# Altium PCB 03-Offset_et_PBF.PcbDoc
Units mm, origin at the board's own origin, x right, y up, seen from the top; angles counter-clockwise.
Board outline 40 x 45 mm, 2 copper layers (Top Layer, Bottom Layer), stack 1.534 mm thick; 21 components, 17 nets, 59 pads, 4 vias.
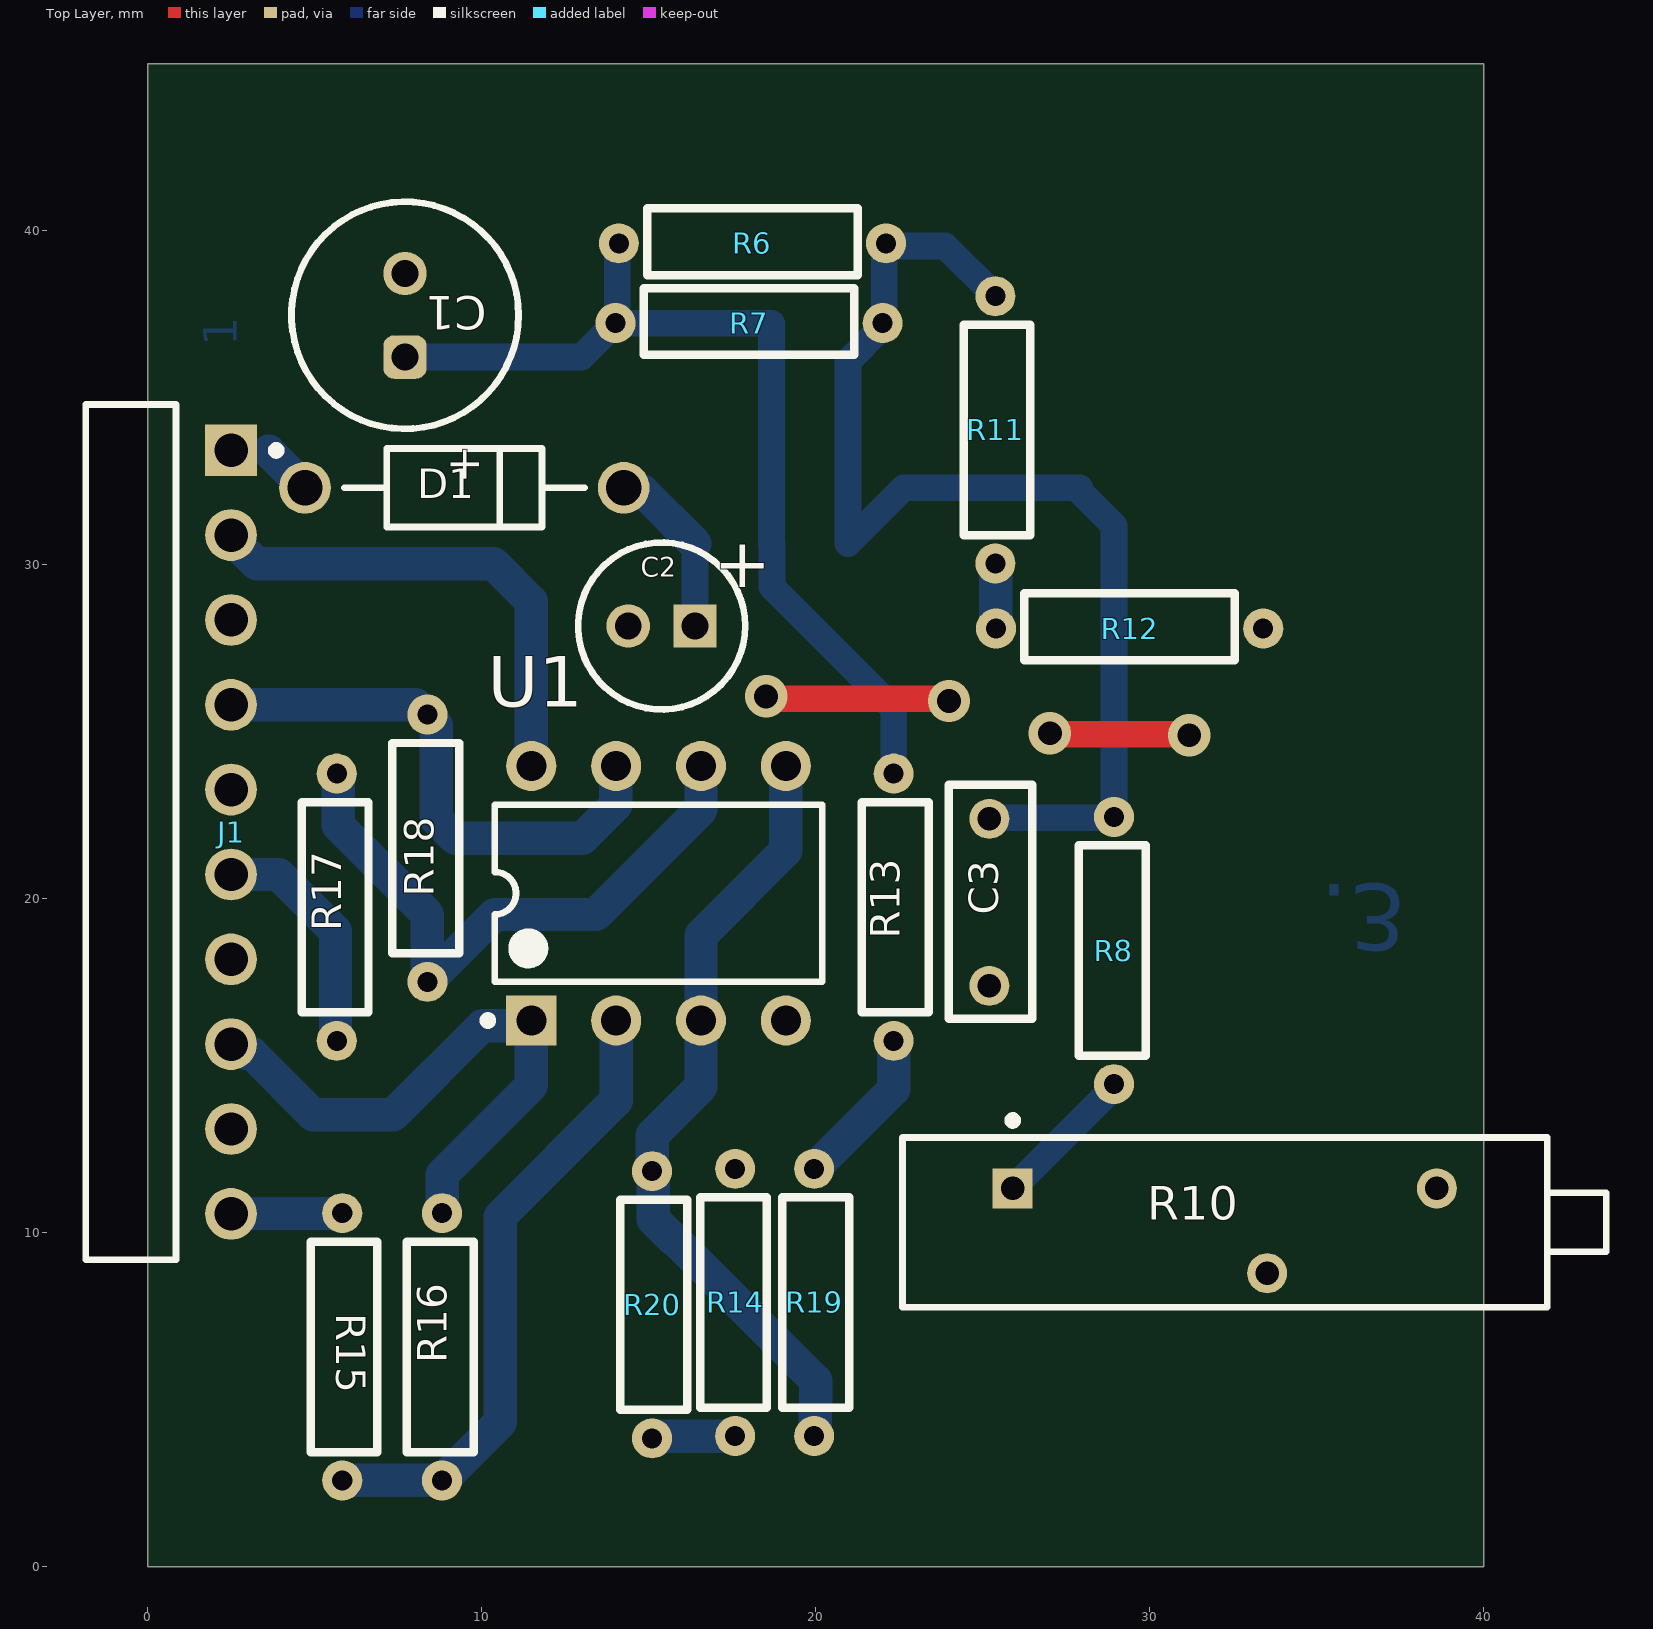
[diagram p0: Top Layer view]
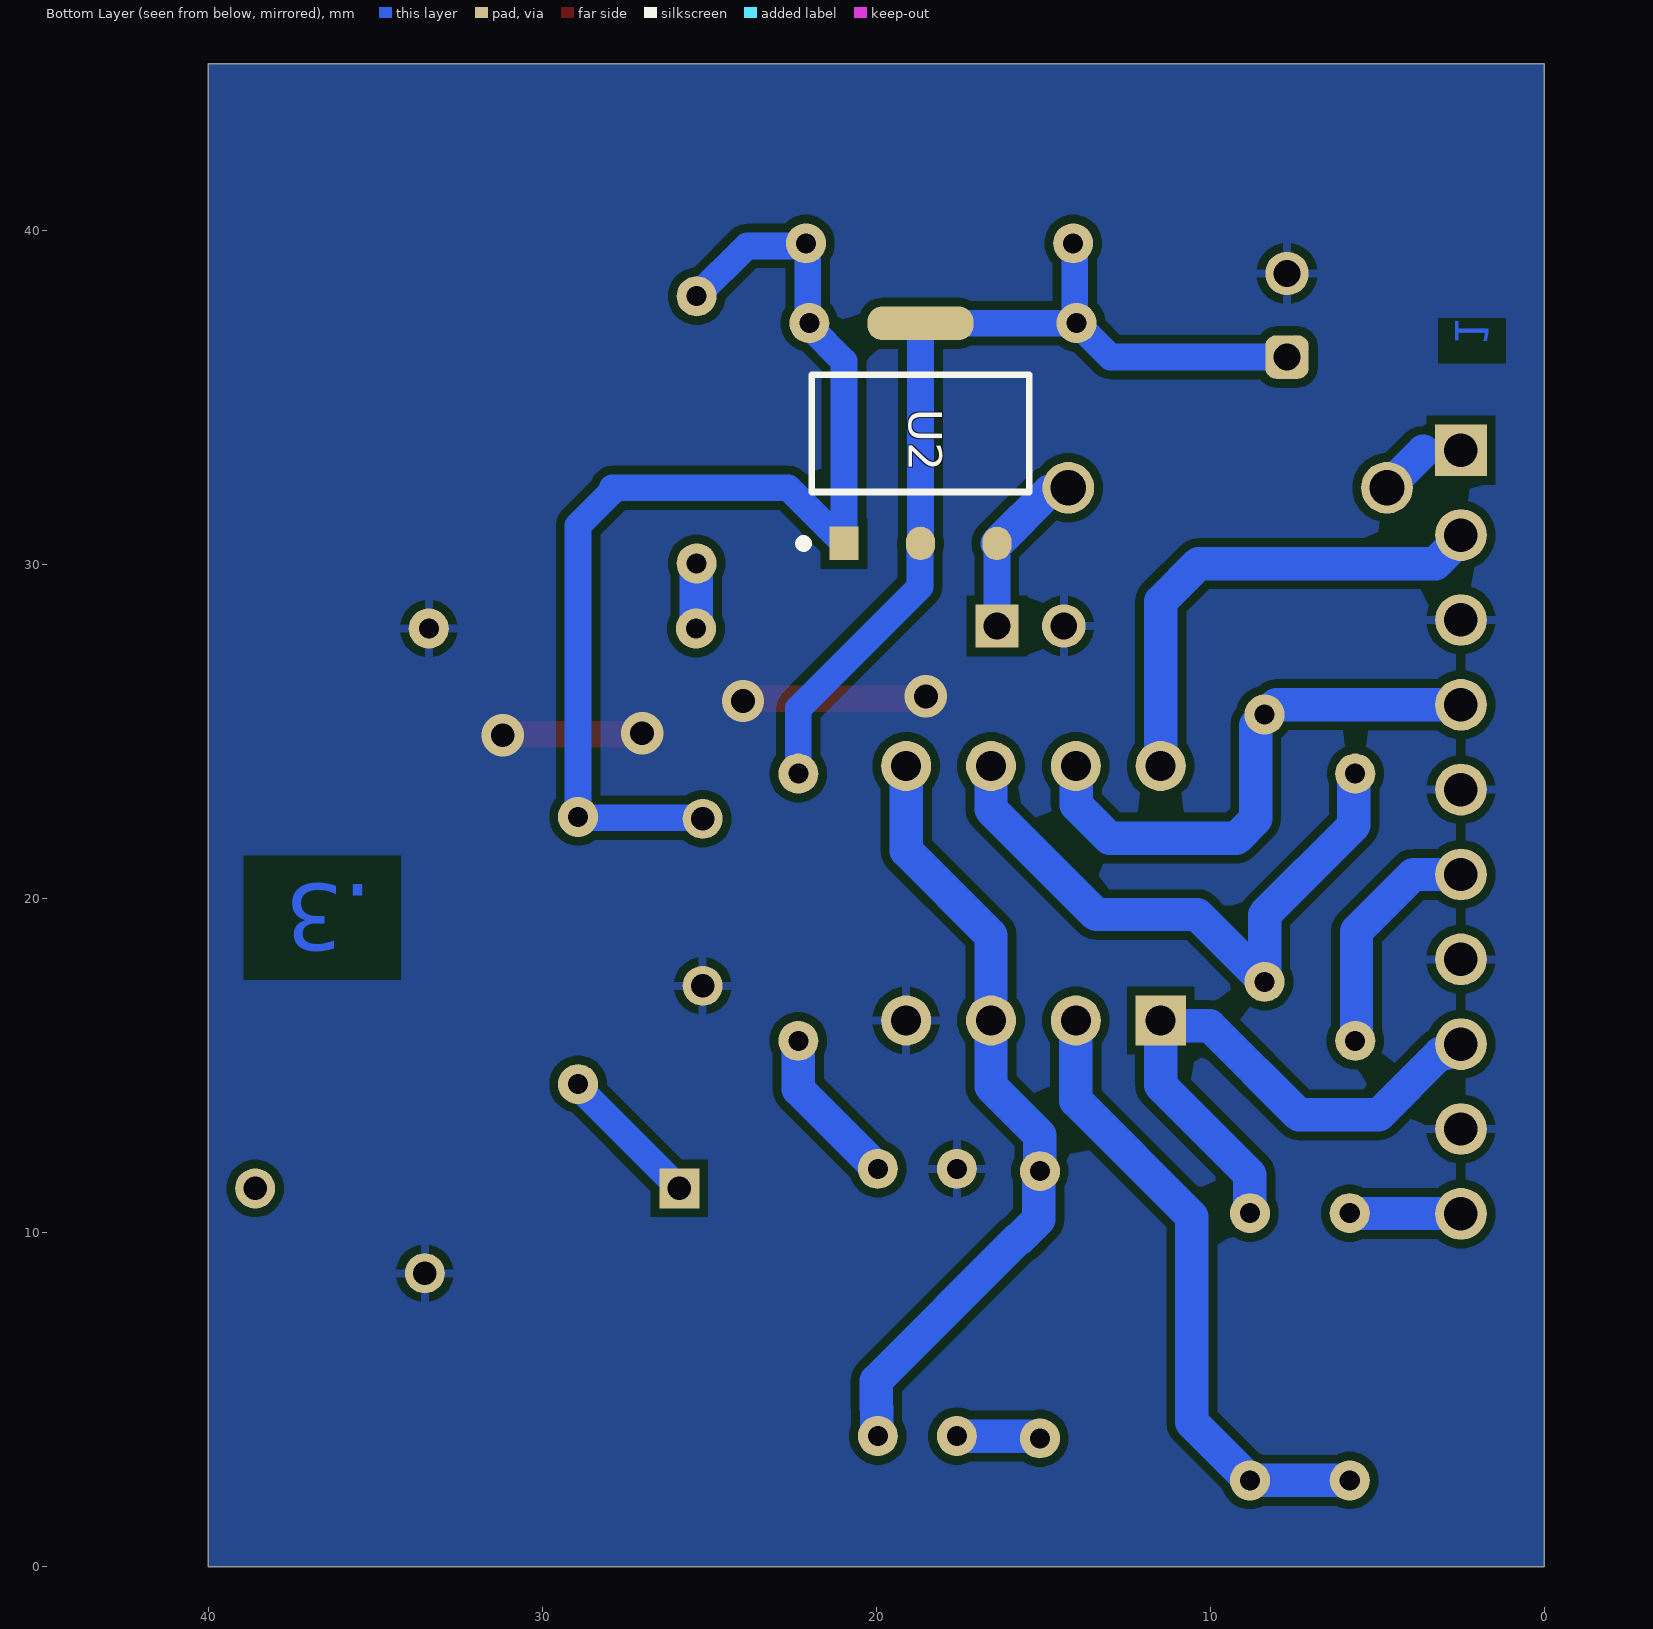
[diagram p1: Bottom Layer view, seen from below]

## Layer stack, top to bottom
Top Solder: solder mask 0.0127, Solder Resist, Dk 3.3
Top Layer: signal copper 0.0178
Dielectric1: core 1.4986, FR-4, Dk 4.3
Bottom Layer: signal copper 0.0178
Bottom Solder: solder mask 0.0127, Solder Resist, Dk 3.3

## Board outline
0,0 0,45 40,45 40,0

## Design rules (kind name [scope] priority, off if disabled: settings)
Clearance [All] p1: gap=0.254 ignorepadtopadclearanceinfootprint=FALSE
DiffPairsRouting [All] p1: maxlimit=0.254 minlimit=0.254 mostfreqgap=0.254 toplayer_minwidth=0.254 toplayer_maxwidth=0.254 toplayer_prefwidth=0.254 bottomlayer_minwidth=0.254 bottomlayer_maxwidth=0.254 bottomlayer_prefwidth=0.254 maxuncoupledlength=12.7
HoleSize [All] p1: absolutevalues=TRUE maxlimit=7.62 minlimit=0.254 maxpercent=80.000 minpercent=20.000
MinimumAnnularRing [All] p1: minimumring=0.254
PasteMaskExpansion [All] p1: expansion=0.254
PlaneClearance [All] p1: clearance=0.381
PlaneConnect [All] p1: pad.planeconnectstyle=Relief pad.reliefexpansion=0.508 pad.reliefentries=4 pad.reliefconductorwidth=0.254 pad.reliefairgap=0.254 via.planeconnectstyle=Direct via.reliefexpansion=0.508 via.reliefentries=4 via.reliefconductorwidth=0.254 via.reliefairgap=0.254
PolygonConnect [All] p1: thpad.connectstyle=Relief thpad.reliefconductorwidth=0.254 thpad.reliefentries=4 thpad.polygonreliefangle="90 Angle" thpad.airgapwidth=0.254 smdpad.connectstyle=Relief smdpad.reliefconductorwidth=0.254 smdpad.reliefentries=4 smdpad.polygonreliefangle="90 Angle" smdpad.airgapwidth=0.254 via.connectstyle=Direct via.reliefconductorwidth=0.254 via.reliefentries=4 via.polygonreliefangle="90 Angle" via.airgapwidth=0.254
RoutingVias [All] p1: holewidth=0.254 width=0.508 viastyle="Through Hole" minholewidth=0.254 minwidth=0.508 maxholewidth=0.254 maxwidth=0.508
SMDNeckDown [All] p1: percent=100.000
SilkToSolderMaskClearance SilkscreenOverComponentPads [IsPad] p1: minsilkscreentomaskgap=0.254 clearancetoexposedcopper=TRUE
SolderMaskExpansion [All] p1: expansion=0.254 istentingtop=FALSE
SupplyNets "Schematic Supply Nets" [InNet('GND')] p1: voltage=0.000
Width [All] p1: maxlimit=2 minlimit=0.5 preferedwidth=1 minimp=50.000000 maximp=50.000000 favimp=50.000000
24 further rules are at their usual default settings.

## Components (designator, comment, footprint, x,y, rotation, side; value= is the part's Value field where it differs from the comment)
C1 "860020373010" WCAP-ATG5_D6.3H11 7.707,37.47 r270 top
C2 "ECA1HM100" CAPPR55-200-1100X500X1200 15.39,28.168 r180 top
C3 "Cap_6.0*2.5*6mm" Cap_6.0%2A2.5%2A6mm 25.2,22.396 r270 top value=10nF
D1 "1N5819RLG" ONSC-AXIAL_LEAD-2-59-10_P 9.485,32.307 r180 top
J1 "90121-0770" FP-90121-0770-MFG -0.5,22 r270 top
R6 "Res_3.5x6.5mm_TH" Res_Axial_3.5x6.5mm_TH 14.108,39.624 r0 top value=1.5k
R7 "Res_3.5x6.5mm_TH" Res_Axial_3.5x6.5mm_TH 14.007,37.236 r0 top value=1.5k
R8 "Res_3.5x6.5mm_TH" Res_Axial_3.5x6.5mm_TH 28.931,14.453 r90 top value=2.2k
R10 "3006P-1-104LF" FP-3006P-1-104LF-MFG 33.134,10.316 r0 top
R11 "Res_3.5x6.5mm_TH" Res_Axial_3.5x6.5mm_TH 25.381,38.041 r270 top value=1.5k
R12 "Res_3.5x6.5mm_TH" Res_Axial_3.5x6.5mm_TH 25.4,28.092 r0 top value=220
R13 "Res_3.5x6.5mm_TH" Res_Axial_3.5x6.5mm_TH 22.337,23.749 r270 top value=1.5k
R14 "Res_3.5x6.5mm_TH" Res_Axial_3.5x6.5mm_TH 17.59,3.917 r90 top value=1k
R15 "Res_3.5x6.5mm_TH" Res_Axial_3.5x6.5mm_TH 5.828,10.589 r270 top value=1k
R16 "Res_3.5x6.5mm_TH" Res_Axial_3.5x6.5mm_TH 8.816,2.589 r90 top value=1k
R17 "Res_3.5x6.5mm_TH" Res_Axial_3.5x6.5mm_TH 5.664,15.749 r90 top value=1k
R18 "Res_3.5x6.5mm_TH" Res_Axial_3.5x6.5mm_TH 8.378,17.516 r90 top value=1k
R19 "Res_3.5x6.5mm_TH" Res_Axial_3.5x6.5mm_TH 19.956,11.917 r270 top value=1.5k
R20 "Res_3.5x6.5mm_TH" Res_Axial_3.5x6.5mm_TH 15.104,11.848 r270 top value=0
U1 "MCP6022-I/P" PDIP300-P8 15.298,20.168 r90 top
U2 "ams1117" FP-ams1117-IPC_C 18.68,33.934 r90 bottom

## Footprints (in the part's own frame and the unit in brackets; to place one, negate y for a bottom-side part, rotate by r counter-clockwise, add the part's x,y. Pads: shape width x height; smd on the part's side, far side on the other; paste and mask are expansions set on the pad)
Cap_6.0%2A2.5%2A6mm [mm]
  round 1.2 hole 0.7: 1(0,0) 2(5,0)
  silkscreen extent -1.02,-1.21 5.98,1.29, body extent -1.02,-1.21 5.98,1.29, height 6
CAPPR55-200-1100X500X1200 [mm] "THD, 2-Leads, Dia 5mm, Body Length 11mm"
  rect 1.3x1.3 hole 0.8: 1(-1,0)
  round 1.3 hole 0.8: 2(1,0)
  silkscreen extent -2.5,-2.5 2.5,2.5, body extent -2.5,-2.5 2.5,2.5, height 12
FP-3006P-1-104LF-MFG [mm]
  rect 1.2x1.2 hole 0.7 paste-2539.97 mask+0: 1(-7.235,1.015)
  round 1.2 hole 0.7 paste-2539.97 mask+0: 2(0.385,-1.525) 3(5.465,1.015)
  silkscreen extent -10.54,-2.54 10.54,3.17, body extent -10.64,-2.64 10.64,2.64, height 0.25
FP-90121-0770-MFG [mm]
  rect 1.55x1.55 hole 1 paste-2539.97 mask+0: 1(-11.43,3)
  round 1.55 hole 1 paste-2539.97 mask+0: 2(-8.89,3) 3(-6.35,3) 4(-3.81,3) 5(-1.27,3) 6(1.27,3) 7(3.81,3) 8(6.35,3) 9(8.89,3) 10(11.43,3)
  silkscreen extent -12.8,-1.35 12.8,4.47, body extent -12.9,-8.4 12.9,3.88, height 0.25
FP-ams1117-IPC_C [mm]
  rect 1.004x0.872 smd paste+0 mask+0: 1(-3.295,2.29)
  rrect100% 1.004x0.872 smd paste+0 mask+0: 2(-3.295,0) 3(-3.295,-2.29)
  rrect87% 1.004x3.182 smd paste+0 mask+0: 4(3.295,0)
  silkscreen extent -3.42,-3.25 1.75,3.63, body extent -3.5,-3.25 3.5,3.25, height 1.8
ONSC-AXIAL_LEAD-2-59-10_P [mm] "AXIAL, 2-Leads, Diameter 2.35mm"
  round 1.55 hole 1.05: 1(-4.77,0) 2(4.77,0)
  silkscreen extent -3.59,-1.17 3.59,1.17
PDIP300-P8 [mm] "8-Pin Plastic Dual In-Line Package (PDIP)"
  rect 1.5x1.5 hole 0.9: 1(-3.81,3.81)
  round 1.5 hole 0.9: 2(-3.81,1.27) 3(-3.81,-1.27) 4(-3.81,-3.81) 5(3.81,-3.81) 6(3.81,-1.27) 7(3.81,1.27) 8(3.81,3.81)
  silkscreen extent -3.93,-4.9 2.65,5.23, body extent -3.55,-4.9 3.55,4.9, height 4.32
Res_Axial_3.5x6.5mm_TH [mm]
  round 1.2 hole 0.6: 0(0,0) 1(8,0)
  silkscreen extent 0.85,-0.95 7.15,1.05, body extent 0.85,-1 7.15,1, height 2.1
WCAP-ATG5_D6.3H11 [mm] "Aluminum Electrolytic Capacitors, 6.3x11mm"
  rrect50% 1.3x1.3 hole 0.8: 1(1.25,0)
  round 1.3 hole 0.8: 2(-1.25,0)
  silkscreen extent -3.4,-3.4 3.4,3.4, body extent -3.6,-3.6 3.6,3.6, height 11

## Part data
C1: library part CMP-03913-53914174-1, "860020373010 WCAP-ATG5 Aluminum Electrolytic Capacitors", Capacitance=220µF, Case/Package=Radial, Leakage Current=35.2µA, Max Operating Temperature=105°C, Min Operating Temperature=-40°C, Ripple Current=215mA, Tolerance=20%, Voltage Rating=16V, Diameter=6.3mm, Height - Seated (Max)=12.4968mm, Lead Pitch=2.4892mm, Length=11mm, Life (Hours)=2000hours, Mount="Through Hole", NexarPartId=53914174, Packaging="Tape & Box (TB)", Pitch=2.5mm, Polarity=Polar, RoHS=Compliant
C2: library part CMP-1665-00038-2, "Aluminum Electrolytic Capacitor, 10 uF, +/- 20%, 50 V, -40 to 85 degC, 2-Pin THD, RoHS, Bulk", Capacitance=10uF, Case/Package=Radial, Dielectric Material=Aluminium, Leakage Current=3uA, Manufacturer=Panasonic, Max Operating Temperature=85degC, Min Operating Temperature=-40degC, Package Description="2-Pin Radial Lead, Dia 5 mm, Height 12 mm", Package Quantity=200, Package Reference=CAPPR55-200-1100X500X1200, Ripple Current=65mA, Tolerance=20%, Voltage=50V, Datasheet URL=https://industrial.panasonic.com/cdbs/www-data/pdf/RDF0000/ABA0000C1218.pdf, Datasheet Version="Rev. 05, 10/2016", Diameter=5mm, Dissipation Factor=0.12%, Height=11mm, Height - Seated (Max)=0.472inch, Lead Diameter=0.5mm, Lead Free=LeadFree, Lead Pitch=2mm, Lead/Base Style=Straight, Length=11mm, Life (Hours)=2000Hour, Manufacturer URL=http://www.panasonic.com/, Mount=ThroughHole, Number of Pins=2, Packaging=Bulk, Radiation Hardening=No, REACH SVHC=NoSVHC, Ripple Current (AC)=65mA, RoHSCompliant=true, Termination=Radial, Voltage Rating=50V, Voltage Rating (DC)=50V
D1: library part CMP-1055-00037-1, "Rectifier, 2-Pin Axial_Lead, Pb-Free, Tape and Reel", Manufacturer="On Semiconductor", ComponentLink1Description="Manufacturer URL", ComponentLink1URL=http://www.onsemi.com/, ComponentLink2Description=Datasheet, ComponentLink2URL=http://www.onsemi.cn/pub_link/Collateral/1N5817-D.PDF, ComponentLink3Description="Package Specification", ComponentLink3URL=http://www.onsemi.cn/pub_link/Collateral/59-10.PDF, Configuration=Single, DatasheetVersion="Rev. 10", IFSM Max (A)=25, Mounting Technology="Through Hole", PackageDescription="2-Pin, Axial Lead, Diameter 2.35 mm", PackageReference=AXIAL_LEAD-2-59-10, PackageVersion="Rev. U, 02/2005", Packing="Tape and Reel", PartNumber=1N5819RLG, RoHS=TRUE
J1: library part CMP-04776-001047-1, "CONN HEADER R/A 10POS 2.54MM", Color=Black, Contact Resistance=20mR, Current Rating=3A, Insulation Resistance=5GR, Max Operating Temperature=125°C, Min Operating Temperature=-55°C, Package Quantity=1, Voltage Rating=350V, Connector Type="Male Pin", Contact Material=Brass, Contact Mating Length=0.266inch, Contact Plating=Gold, Contact Type="Male Pin", Gender=Male, Glow Wire Compliant=Non-compliant, Housing Color=Black, Housing Material=Polyester, Lead Free="Lead Free", Lead Pitch=2.54mm, Material=Glass, Mount="Through Hole", Number of Circuits=9, Number of Contacts=10, Number of Poles=10, Number of Positions=10, Number of Rows=1, Orientation="Right Angle", Packaging=Bulk, Pitch=2.54mm, Radiation Hardening=No, RoHS Compliant=Yes, Series="C-Grid III™ 90121", System=Connector, Termination=Solder, Voltage Rating (AC)=350V, Working Voltage=350V
R10: library part CMP-07234-000037-1, "TRIMMER 100K OHM 0.75W PC PIN", Color=Blue, Insulation Resistance=1GR, Manufacturer Series=3006, Max Operating Temperature=125°C, Max Power Dissipation=750mW, Min Operating Temperature=-55°C, Package Quantity=100, Resistance=5k, Resistance Law=Linear, Resistance Tolerance=10%, Resistor Type=Cermet, Temperature Coefficient=100ppm/°C, Actuator Orientation=Horizontal, Actuator Type=SCREW, Depth=4.83mm, Height=6.35mm, Lead Free="Contains Lead", Length=20.57mm, Military Standard=Not, Mount="Through Hole", Number of Pins=3, Number of Terminals/Pins=3, Number of Turns=15, Packaging=Rail/Tube, Pin Diameter=0.6mm, Pitch=2.5mm, Power Rating=750mW, Radiation Hardening=No, REACH SVHC="No SVHC", RoHS Compliant=Yes, Series=3006, Taper=Linear, Technology=CERMET, Terminal Finish=Tin, Termination=Pin, Thickness=5.59mm, Tolerance=10%, Type=Potentiometer, Weight=0.04oz, Width=4.83mm
U1: library part CMP-0187-00094-3, "None", Case/Package=PDIP, Input Bias Current=150pA, Input Offset Voltage (Vos)=500uV, Max Frequency=10kHz, Max Input Voltage=5.8V, Max Operating Temperature=85°C, Max Output Current=30mA, Max Supply Current=2mA, Max Supply Voltage=5.5V, Min Input Voltage=-300mV, Min Operating Temperature=-40°C, Min Supply Voltage=2.5V, Nominal Supply Current=1mA, Output Current=22mA, Package Quantity=60, Power Supply Rejection Ratio (PSRR)=74dB, Voltage Gain=110dB, Amplifier Type="GENERAL PURPOSE", Bandwidth=10MHz, Common Mode Rejection Ratio=70dB, Gain Bandwidth Product=10MHz, Height=0.195inch, Input Offset Voltage-Max=500uV, Lead Free="Lead Free", Lead Pitch=2.54mm, Length=0.4inch, Mount="Through Hole", Number of Amplifiers=2, Number of Channels=2, Number of Circuits=2, Number of Elements=2, Number of Pins=8, Packaging=Rail/Tube, Radiation Hardening=No, REACH SVHC="No SVHC", RoHS Compliant=Yes, Row Spacing=9.4mm, Settling Time=250ns, Slew Rate=7V/µs, Slew Rate-Nom=7V/µs, Supply Current=1mA, Technology=CMOS, Unity Gain Bandwidth Product=10MHz, Width=0.28inch
U2: library part CMP-209535-000002-1, "1A LOW DROPOUT VOLTAGE REGULATOR", RoHS Compliant=Yes

## Via types
v1: diameter 1.27, hole 0.711, Top Layer to Bottom Layer, 4 vias

## Nets (pads, with @x,y where several pads share a name; then routed paths per layer and width w, separated by ;. In a path a pad name is that pad's centre, name@x,y a point inside that pad or via, vN(x,y) a via of type N, cw(c..) or ccw(c..) an arc to the next point about the centre after c; other vN are vias at no path point)
3V3: J1.2 U1.8 | length 14.7
  Bottom Layer w1: J1.2@2.516,30.785 3.263,30.037 10.355,30.037 11.488,28.905 U1.8
5V: D1.2 J1.1 | length 1.8
  Bottom Layer w1: 3.626,33.395 D1.2 D1.2@4.883,32.139
GND: C1.2 C2.2 C3.2 J1.3 J1.5 J1.7 J1.9 R10.2 R12.1 R14.1 U1.4 | length 9.7
  Top Layer w0.8: v1(18.517,26.06) 18.586,25.991 23.923,25.991 v1(23.992,25.922) ; v1(27.015,24.955) 27.042,24.928 31.154,24.928 v1(31.182,24.9)
NetC2_1: C2.1 D1.1 U2.3 | length 5.3
  Bottom Layer w0.8: C2.1 U2.3
  Bottom Layer w1: D1.1 14.36,32.201 14.828,32.201 U2.3
NetR8_0: R8.0 R10.1 | length 4.7
  Bottom Layer w0.8: R10.1@26.099,11.531 R10.1 28.931,14.363 R8.0
NetR11_1: R11.1 R12.0 | length 2
  Bottom Layer w1: R11.1 25.39,30.031 25.39,28.102 R12.0
NetR13_1: R13.1 R19.0 | length 4.8
  Bottom Layer w1: R19.0 22.338,14.3 R13.1@22.338,15.749
NetR14_0: R14.0 R20.1 | length 2.5
  Bottom Layer w1: R20.1 15.158,3.848 15.227,3.917 R14.0
NetR15_1: R15.1 R16.0 U1.2 | length 18.9
  Bottom Layer w1: R15.1 R16.0 10.552,4.325 10.552,10.484 14.028,13.96 U1.2
NetR17_1: R17.1 R18.0 U1.6 | length 19
  Bottom Layer w1: R17.1 5.702,23.711 5.702,22.203 8.378,19.528 R18.0 10.395,19.533 13.422,19.533 16.568,22.678 U1.6
V_out_offset_1: J1.8 R16.1 U1.1 | length 17.9
  Bottom Layer w1: J1.8 2.649,15.65 2.924,15.375 3.116,15.375 4.959,13.532 7.348,13.532 10.02,16.204 11.334,16.204 U1.1 11.488,14.414 8.816,11.743 R16.1
V_out_offset_2: J1.4 R18.1 U1.7 | length 16.4
  Bottom Layer w1: J1.4 8.03,25.81 8.324,25.516 R18.1 8.378,25.461 8.637,25.203 8.637,22.396 9.223,21.81 13.012,21.81 14.013,22.81 14.013,23.963 U1.7
Vin_offset_1: J1.10 R15.0 | length 3.3
  Bottom Layer w1: J1.10 2.51,10.58 5.819,10.58 R15.0
Vin_offset_2: J1.6 R17.0 | length 7.1
  Bottom Layer w1: J1.6 3.929,20.73 5.626,19.033 5.626,15.787 R17.0
VREF_3V3: C1.1 R6.0 R7.0 R13.0 U2.2 U2.4 | length 29.2
  Bottom Layer w0.8: C1.1@7.457,36.47 C1.1 12.991,36.22 R7.0 ; R6.0 14.057,39.574 14.057,37.287 R7.0 ; R13.0 22.337,25.698 18.694,29.341 18.694,30.626 U2.2 U2.4 18.676,37.233 14.011,37.233 R7.0
VREF_3V3_ADJ: C3.1 R6.1 R7.1 R8.1 R11.0 U2.1 | length 34.9
  Bottom Layer w0.8: U2.1 20.97,36.091 22.007,37.128 R7.1 22.057,37.287 22.057,39.574 R6.1 22.184,39.547 23.874,39.547 R11.0 ; U2.1@20.97,30.705 21.006,30.742 21.072,30.742 22.637,32.307 27.897,32.307 ; C3.1 25.228,22.424 28.902,22.424 R8.1 28.931,31.173 27.897,32.207
Vref_825mV: R19.1 R20.0 U1.3 U1.5 | length 23.8
  Bottom Layer w1: U1.5@19.133,23.978 U1.5 19.108,21.444 16.568,18.904 U1.3 16.568,14.382 15.104,12.918 R20.0 15.142,11.81 15.142,10.401 15.728,9.816 15.764,9.816 20.006,5.574 20.006,4.767 19.994,4.755 19.994,3.955 R19.1
pads on no net: R10.3

## Polygon pours and split planes (outlines as drawn)
GND on Bottom Layer "GND_L02_P000" (solid, pour order 0): 0,45 0,0 40,0 40,45

## Other copper
Bottom Layer:
  text "1" at 2.67,36.54 h1 r90
  text ".3" at 35.093,20.438 h2 r180

## Silkscreen, mask and mechanical layers (free items; w line width, h text height)
Top Overlay:
  lines w0.254: 18.54,8.755 18.54,9.735

## Text inside footprints (layer, text, board x,y; h text height)
C1: Top Overlay "+" at 9.073,33.577 h1 r270
C2: Top Overlay "+" at 18.666,30.606 h1.5 r180